# Altium PCB CSP.PcbDoc
Units mm, origin at the board's own origin, x right, y up, seen from the top; angles counter-clockwise.
Board outline 37.21 x 61.85 mm, 2 copper layers (Top Layer, Bottom Layer); 47 components, 23 nets, 91 pads, 56 vias.
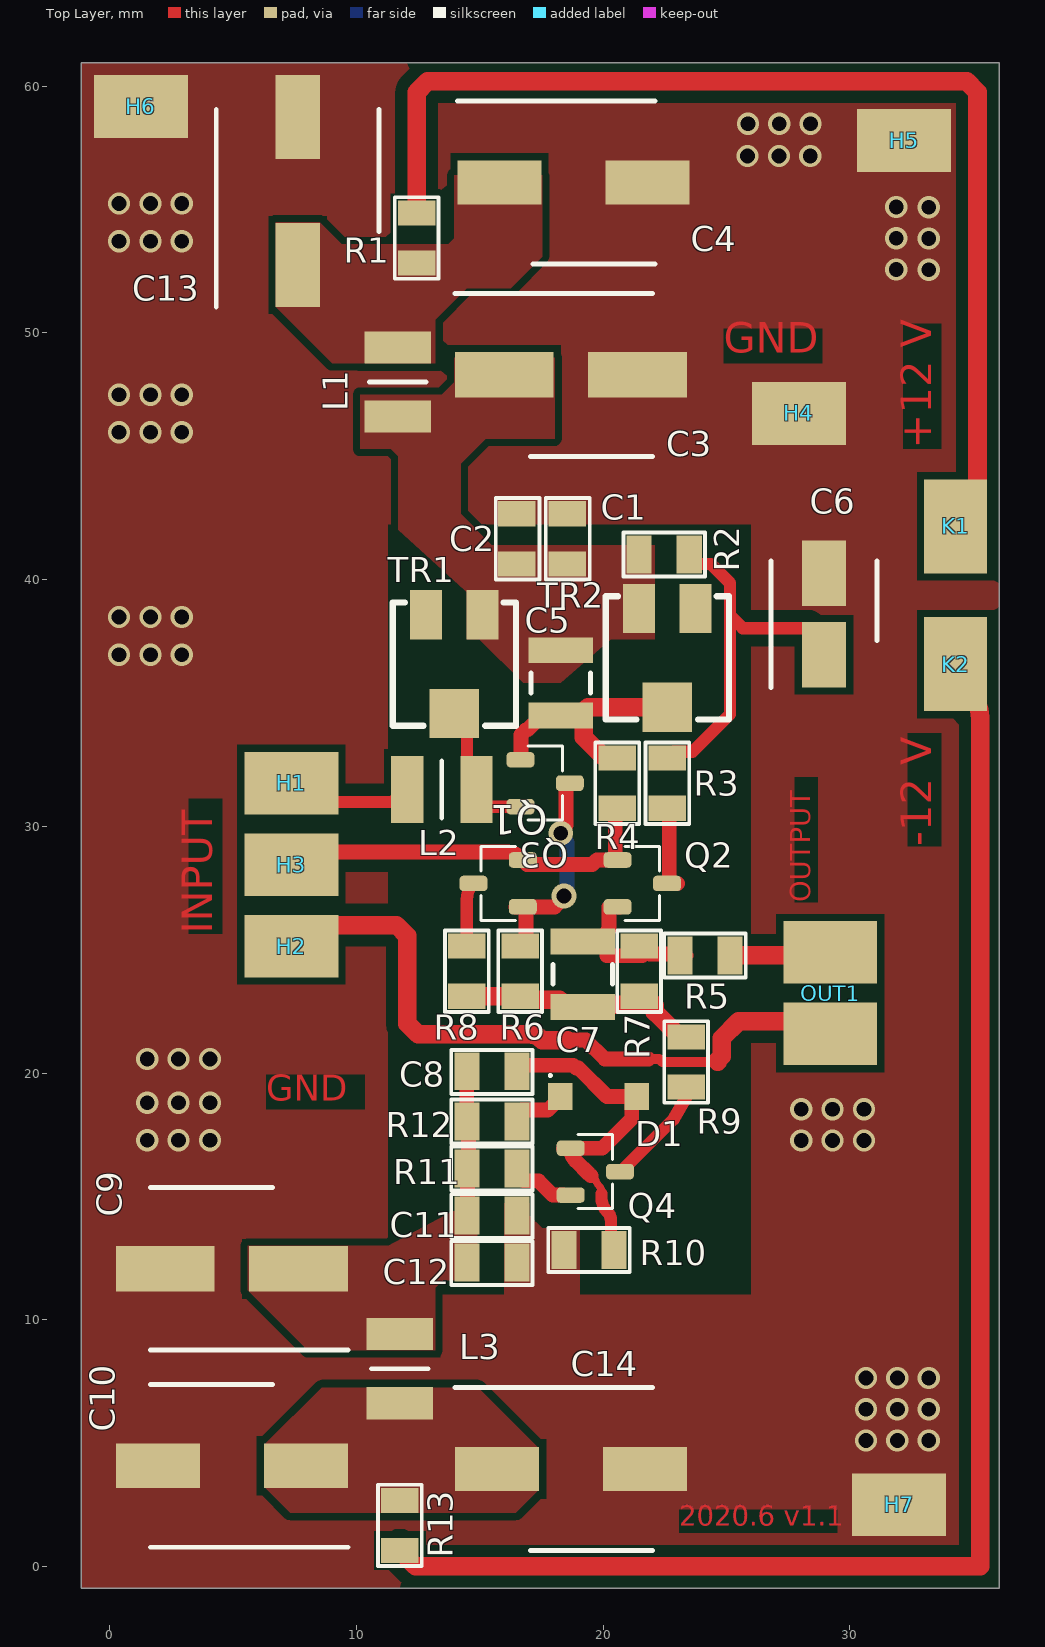
[diagram p0: Top Layer view]
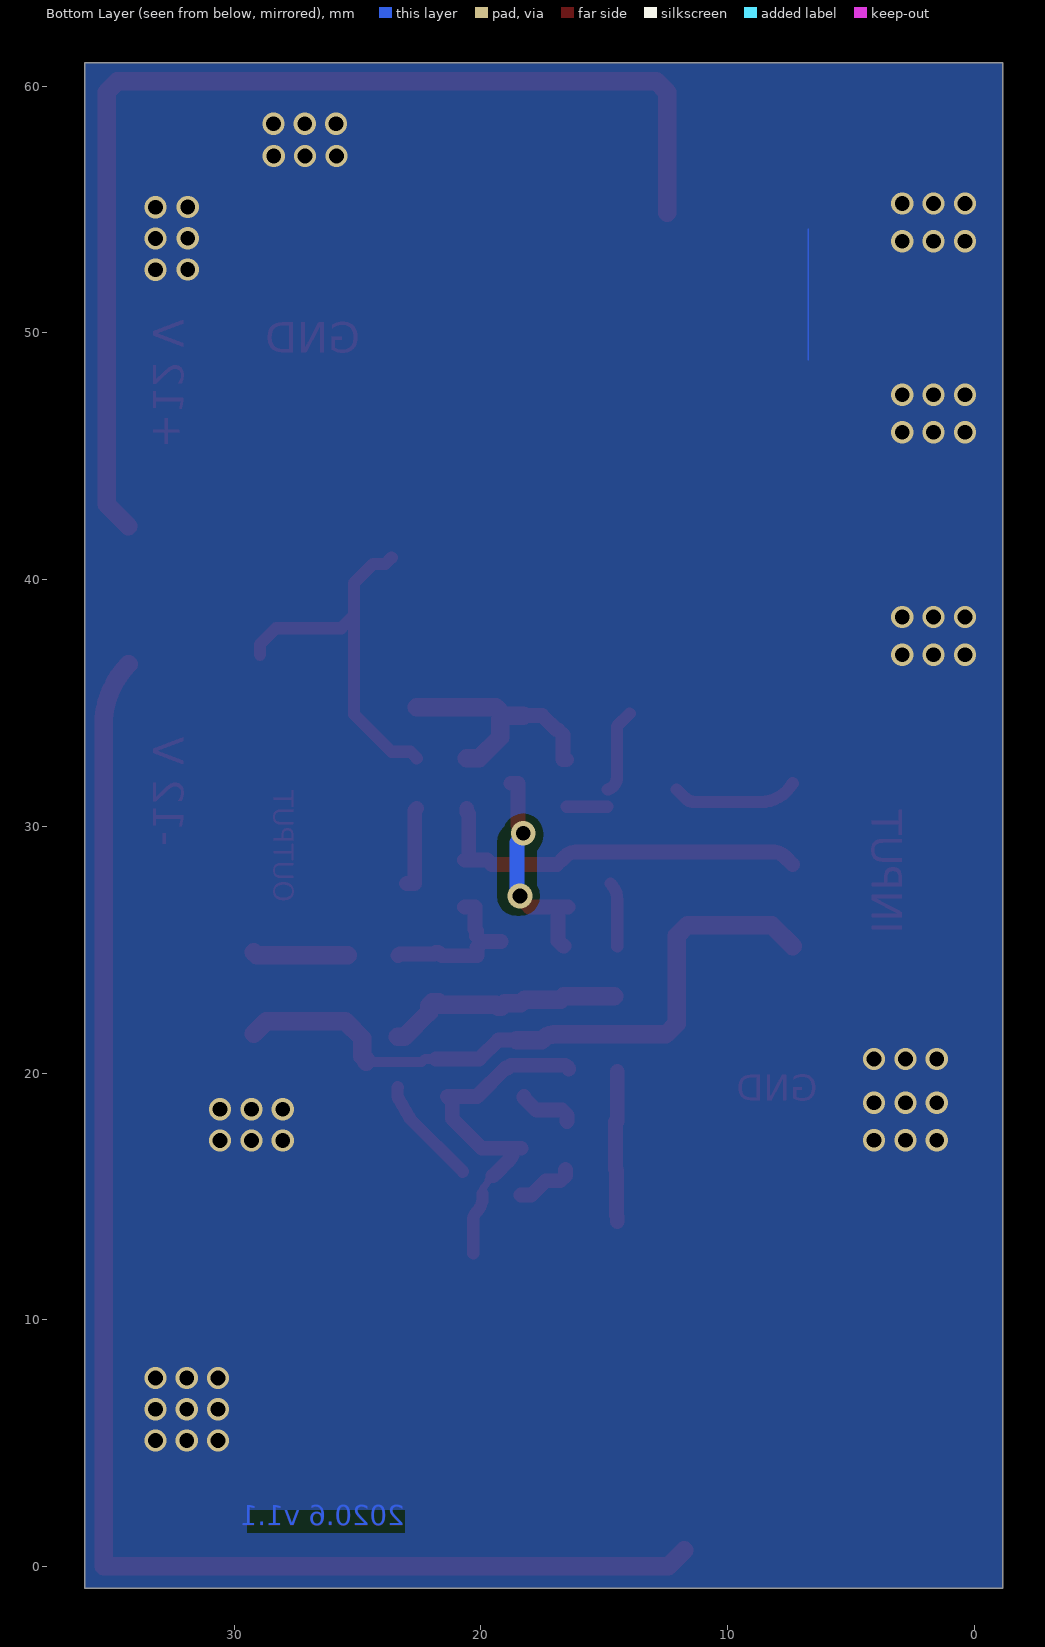
[diagram p1: Bottom Layer view, seen from below]
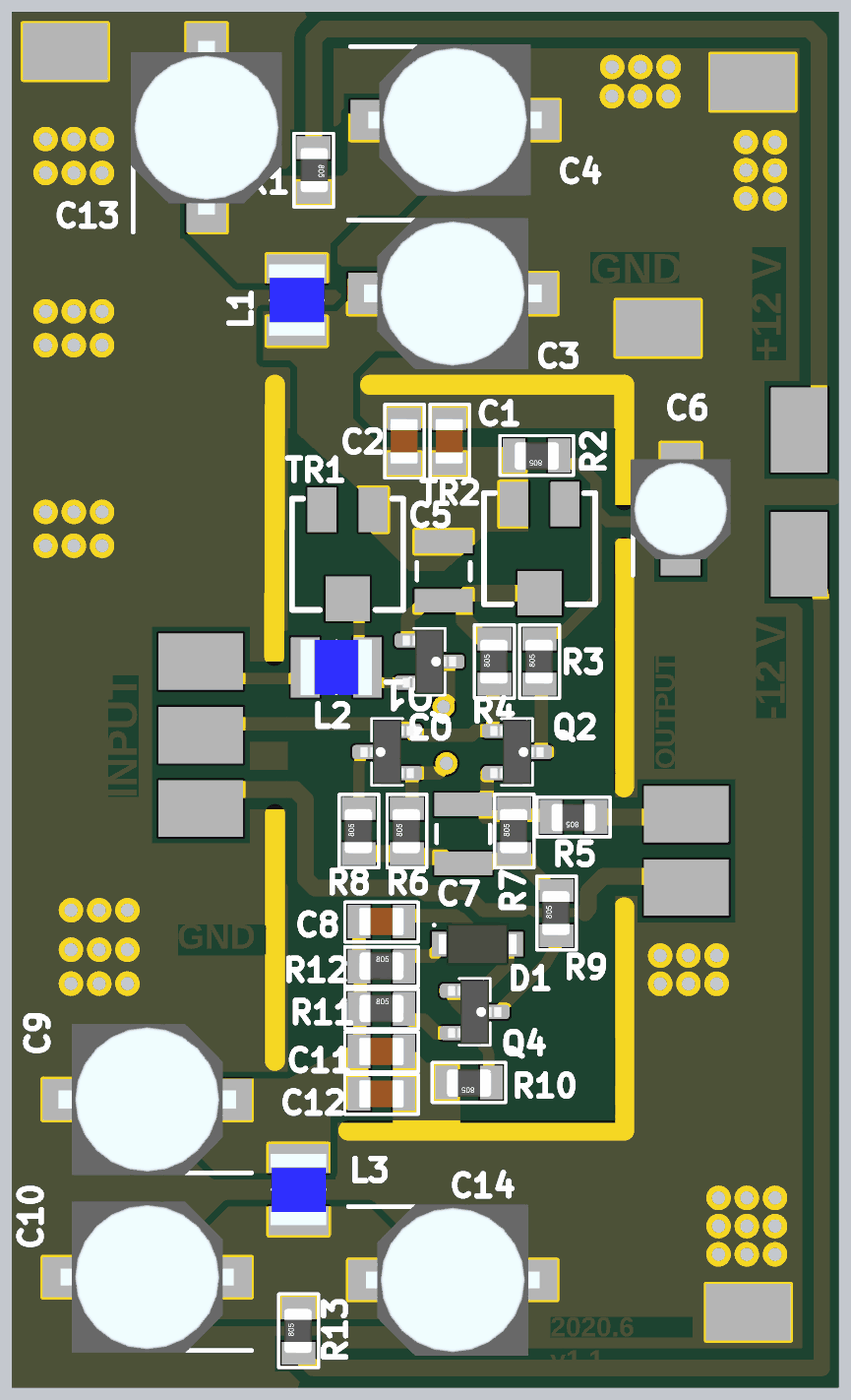
[diagram p2: 3D render of the assembled board from above, using the file's embedded part models]

## Layer stack, top to bottom
Top Solder: solder mask 0.0102, Solder Resist, Dk 3.5
Top Layer: signal copper 0.0356
Dielectric 1: dielectric 0.32, FR-4, Dk 4.8
Bottom Layer: signal copper 0.0356
Bottom Solder: solder mask 0.0102, Solder Resist, Dk 3.5

## Board outline
-1.143,-0.889 36.068,-0.889 36.068,60.96 -1.143,60.96

## Design rules (kind name [scope] priority, off if disabled: settings)
Clearance [All] p1: gap=0.3 ignorepadtopadclearanceinfootprint=FALSE except(0: Arc-Text Arc-Hole Track-Text Track-Hole SMDPad-Text SMDPad-Hole THPad-Text THPad-Hole Via-Text Via-Hole Fill-Text Fill-Hole Poly-Text Poly-Hole Region-Text Region-Hole Text-Text Text-Hole; 0.5: Track-Poly)
HoleSize [All] p1: absolutevalues=TRUE maxlimit=2.54 minlimit=0.406 maxpercent=80.000 minpercent=20.000
MinimumSolderMaskSliver [All] p1: minsoldermaskwidth=0.152
PlaneConnect [All] p1: planeconnectstyle=Direct reliefexpansion=0.508 reliefentries=4 reliefconductorwidth=0.254 reliefairgap=0.254
PolygonConnect [All] p1: connectstyle=Direct reliefconductorwidth=0.254 reliefentries=4 polygonreliefangle="90 Angle" airgapwidth=0.254
RoutingVias [All] p1: holewidth=0.711 width=1.27 viastyle="Through Hole" minholewidth=0.3 minwidth=0.6 maxholewidth=0.711 maxwidth=1.27
ShortCircuit ShortCircuit_1 [All] p1: allowed=FALSE
ShortCircuit TEXT [All] p2 off: allowed=TRUE
SilkToSilkClearance [All] p1 off: silktosilkclearance=0.254
SilkToSolderMaskClearance [IsPad] p1 off: minsilkscreentomaskgap=0.254 clearancetoexposedcopper=TRUE
SolderMaskExpansion [All] p1: expansion=0.102 istentingtop=FALSE
Width [All] p1: maxlimit=5 minlimit=0.254 preferedwidth=0.6 minimp=50.000000 maximp=50.000000 favimp=50.000000
24 further rules are at their usual default settings.

## Components (designator, comment, footprint, x,y, rotation, side; value= is the part's Value field where it differs from the comment)
C1 "0.01uF" SMD-0805-C 18.542,41.656 r270 top
C2 "0.1uF" SMD-0805-C 16.51,41.656 r270 top
C3 "22uF" CAPAE660X550N 18.7,48.3 r0 top
C4 "100uF" CAPAE660X800N 18.8,56.1 r0 top
C5 "1uF" CAPC3225X15L 18.288,35.814 r90 top
C6 "1uF" CAPAE430X550N 28.956,38.608 r90 top
C7 "1uF" CAPC3225X15L 19.177,24.003 r90 top
C8 "0.01uF" SMD-0805-C 15.494,20.066 r180 top
C9 "22uF" CAPAE660X550N 4.953,12.065 r180 top
C10 "100uF" CAPAE660X800N 4.953,4.077 r180 top
C11 "0.01uF" SMD-0805-C 15.494,14.224 r180 top
C12 "0.1uF" SMD-0805-C 15.494,12.319 r180 top
C13 "100uF" CAPAE660X800N 7.62,55.753 r90 top
C14 "100uF" CAPAE660X800N 18.7,3.95 r0 top
D1 "1n4448" SODFL350X110-2N 19.812,19.05 r0 top
H1 "PAD" PAD 7.366,31.75 r0 top
H2 "PAD" PAD 7.366,25.146 r0 top
H3 "PAD" PAD 7.366,28.448 r0 top
H4 "PAD" PAD 27.94,46.736 r0 top
H5 "PAD" PAD 32.2,57.8 r0 top
H6 "PAD" PAD 1.27,59.182 r0 top
H7 "PAD" PAD 32,2.5 r0 top
K1 "+12V" PAD 34.29,42.164 r90 top
K2 "-12V" PAD 34.29,36.576 r90 top
L1 "390uH" INDC3225X270N 11.684,48.006 r90 top
L2 "390uH" INDC3225X270N 13.462,31.496 r0 top
L3 "390uH" INDC3225X270N 11.763,8.014 r90 top
OUT1 "OUTPUT" IN/OUT 29.21,24.892 r0 top
Q1 "MMBTH81" SOT23-3P95_240X110L53X44N 17.653,31.75 r180 top
Q2 "2N3904" SOT23-3P95_240X110L53X44N 21.59,27.686 r180 top
Q3 "2N3906" SOT23-3P95_240X110L53X44N 15.748,27.686 r0 top
Q4 "2N3904" SOT23-3P95_240X110L53X44N 19.685,16.002 r180 top
R1 "100" SMD-0805-RES 12.446,53.848 r270 top
R2 "33" SMD-0805-RES 22.479,41.021 r180 top
R3 "33" SMD-0805-RES 22.606,31.75 r90 top
R4 "3K" SMD-0805-RES 20.574,31.75 r90 top
R5 "51" SMD-0805-RES 24.13,24.765 r180 top
R6 "15k" SMD-0805-RES 16.637,24.13 r90 top
R7 "500" SMD-0805-RES 21.463,24.13 r90 top
R8 "33" SMD-0805-RES 14.478,24.13 r90 top
R9 "33" SMD-0805-RES 23.368,20.447 r90 top
R10 "10K" SMD-0805-RES 19.431,12.827 r180 top
R11 "100" SMD-0805-RES 15.494,16.129 r0 top
R12 "1.4k" SMD-0805-RES 15.494,18.034 r0 top
R13 "100" SMD-0805-RES 11.763,1.664 r90 top
TR1 "20k" POT4MM-2 13.97,36.576 r270 top
TR2 "20k" POT4MM-2 22.606,36.83 r270 top

## Footprints (in the part's own frame and the unit in brackets; to place one, negate y for a bottom-side part, rotate by r counter-clockwise, add the part's x,y. Pads: shape width x height; smd on the part's side, far side on the other; paste and mask are expansions set on the pad)
CAPAE430X550N [mm]
  rect 2.65x1.8 smd: 1(-1.65,0) 2(1.65,0)
  silkscreen extent -2.98,-2.15 2.15,2.15, body extent -2.25,-2.25 2.25,2.25, height 5.5
CAPAE660X550N [mm]
  rect 4x1.85 smd: 1(-2.7,0) 2(2.7,0)
  silkscreen extent -4.7,-3.3 3.3,3.3, body extent -4,-3.4 4,3.4, height 5.5
CAPAE660X800N [mm]
  rect 3.4x1.8 smd: 1(-3,0) 2(3,0)
  silkscreen extent -4.7,-3.3 3.3,3.3, body extent -3.9,-3.4 3.9,3.4, height 8
CAPC3225X15L [mm] "Chip Capacitor, 1210, 2-Leads, Body 3,20x2,50mm, IPC High Density"
  rect 1.05x2.6 smd: 1(-1.325,0) 2(1.325,0)
  silkscreen extent -0.4,-1.2 0.4,1.2, body extent -1.7,-1.35 1.7,1.35, height 1.5
IN/OUT [mil]
  rect 150x100 smd: 1(0,0) 2(0,-130)
INDC3225X270N [mm]
  rect 1.3x2.7 smd: 1(-1.4,0) 2(1.4,0)
  silkscreen extent 0,-1.15 0,1.15, body extent -1.6,-1.25 1.6,1.25, height 2.7
PAD [mm]
  rect 3.81x2.54 smd: 1(0,0)
POT4MM-2 [mm] "Square Trimming Potentiometer"
  rect 2x1.3 smd: CCW(-2,-1.15) CW(-2,1.15)
  rect 2x2 smd: W(2,0)
  silkscreen extent -2.5,-2.5 2.5,2.5
SMD-0805-C [mil]
  rect 40x60 smd: 1(-40,0) 2(40,0)
  silkscreen extent -65,-34 65,36, body extent -40,-25 40,25, height 37
SMD-0805-RES [mil]
  rect 40x60 smd: 1(-40,0) 2(40,0)
  silkscreen extent -65,-35 65,35, body extent -39,-24 39,26, height 31
SODFL350X110-2N [mm] "SODFL, 2-Leads, Body 1.70x3.50mm, IPC Medium Density"
  rect 1x1.1 smd: A(1.55,0) C(-1.55,0)
  silkscreen extent -2,0.8 -1.9,0.9, body extent -1.75,-0.95 1.75,0.95, height 1.1
SOT23-3P95_240X110L53X44N [mm] "Small Outline Transistor (SOT23), 0.95 mm pitch; 3 pin, 2.90 mm L X 1.30 mm W X 1.10 mm H body"
  rrect51% 1.13x0.63 smd: 1(-1,0) 2(1,0.95) 3(1,-0.95)
  silkscreen extent -0.7,-1.5 0.7,1.5, body extent -1.2,-1.45 1.2,1.45, height 1.1

## Part data
C1 C8 C11: library part Cap, "Capacitor", LCSC Part #=C1710, LatestRevisionDate=17-Jul-2002, LatestRevisionNote="Re-released for DXP Platform.", PackageDescription="Radial Cap, Thru-Hole; 2 Leads; 0.3 in Pin Spacing", PackageReference=RAD-0.3, Published=8-Jun-2000, Publisher="Altium Limited"
C2 C12: library part Cap, "Capacitor", LCSC Part #=C49678, LatestRevisionDate=17-Jul-2002, LatestRevisionNote="Re-released for DXP Platform.", PackageDescription="Radial Cap, Thru-Hole; 2 Leads; 0.3 in Pin Spacing", PackageReference=RAD-0.3, Published=8-Jun-2000, Publisher="Altium Limited"
C3 C9: library part TYEH1V226F55MTR, "22uF 35V, Capacitor Polarised", LCSC Part #=C249771, Voltage=35V, Dimension=6.3x5.3mm, Part number=TYEH1V226F55MTR
C4 C10 C13 C14: library part EEEFK1E101P, "100uF 25V, cap polarised", LCSC Part #=C249983, Voltage=25V, Dimensions=8x6.2mm, Part number=EEEFK1E101P
C5 C7: library part capacitor, LCSC Part #=C117027
C6: library part UWT1H010MCL1GB, "1uF 50V, Capacitor Polarised", Manufacturer_Name=Nichicon, Voltage=50V, Dimensions=4x5.4mm, Part number=UWT1H010MCL1GB
D1: library part Diode, "SOD123, 1n4446 orginally", LCSC Part #=C108428
L1 L2 L3: library part NLV10JT391, "390uH, Inductor, LCSC part is 330uH1!!!", LCSC Part #=C87557, Package=1210, Resistance=36
Q1: library part PNP, "PNP Bipolar Transistor, Aternatives: NTE2403", LCSC Part #=C190349, LatestRevisionDate=29-May-2009, LatestRevisionNote="IPC-7351 Footprint Added.", PackageDescription="3-Pin SOT-23 Package 0.95 mm Pitch, 2.4 mm Lead Span", PackageReference=SOT-23B, PackageVersion=Aug-1999, Published=8-Jun-2000, Publisher="Altium Limited", Supplier 1=Arrow, Supplier 2=Digi-Key, Supplier Part Number 1=MMBTH81, Supplier Part Number 2=KST10MTFCT-ND
Q2 Q4: library part NPN, "NPN Bipolar Transistor", LCSC Part #=C18536, Code_JEDEC=TO-226-AA, LatestRevisionDate=17-Jul-2002, LatestRevisionNote="Re-released for DXP Platform.", PackageDescription="TO, Flat Index; 3 In-Line, Axial Leads; Body Dia. 4.8mm; Leads 0.55 x 0.51 mm (max)", PackageReference=TO-226-AA, Published=8-Jun-2000, Publisher="Altium Limited"
Q3: library part PNP, "PNP Bipolar Transistor", LCSC Part #=C14488, LatestRevisionDate=29-May-2009, LatestRevisionNote="IPC-7351 Footprint Added.", PackageDescription="3-Pin SOT-23 Package 0.95 mm Pitch, 2.4 mm Lead Span", PackageReference=SOT-23B, PackageVersion=Aug-1999, Published=8-Jun-2000, Publisher="Altium Limited"
R1 R11 R13: library part Res1, "Resistor", LCSC Part #=C17408, LatestRevisionDate=17-Jul-2002, LatestRevisionNote="Re-released for DXP Platform.", PackageDescription="Axial Device, Thru-Hole; 2 Leads; 0.3 in Pin Spacing", PackageReference=AXIAL-0.3, Published=8-Jun-2000, Publisher="Altium Limited"
R2 R3 R8 R9: library part Res1, "Resistor", LCSC Part #=C17634, LatestRevisionDate=17-Jul-2002, LatestRevisionNote="Re-released for DXP Platform.", PackageDescription="Axial Device, Thru-Hole; 2 Leads; 0.3 in Pin Spacing", PackageReference=AXIAL-0.3, Published=8-Jun-2000, Publisher="Altium Limited"
R4: library part Res1, "Resistor", LCSC Part #=C17661, LatestRevisionDate=17-Jul-2002, LatestRevisionNote="Re-released for DXP Platform.", PackageDescription="Axial Device, Thru-Hole; 2 Leads; 0.3 in Pin Spacing", PackageReference=AXIAL-0.3, Published=8-Jun-2000, Publisher="Altium Limited"
R5: library part Res1, "Resistor", LCSC Part #=C17738, LatestRevisionDate=17-Jul-2002, LatestRevisionNote="Re-released for DXP Platform.", PackageDescription="Axial Device, Thru-Hole; 2 Leads; 0.3 in Pin Spacing", PackageReference=AXIAL-0.3, Published=8-Jun-2000, Publisher="Altium Limited"
R6: library part Res1, "Resistor", LCSC Part #=C17475, LatestRevisionDate=17-Jul-2002, LatestRevisionNote="Re-released for DXP Platform.", PackageDescription="Axial Device, Thru-Hole; 2 Leads; 0.3 in Pin Spacing", PackageReference=AXIAL-0.3, Published=8-Jun-2000, Publisher="Altium Limited"
R7: library part Res1, "Resistor", LCSC Part #=C17734, LatestRevisionDate=17-Jul-2002, LatestRevisionNote="Re-released for DXP Platform.", PackageDescription="Axial Device, Thru-Hole; 2 Leads; 0.3 in Pin Spacing", PackageReference=AXIAL-0.3, Published=8-Jun-2000, Publisher="Altium Limited"
R10: library part Res1, "Resistor", LCSC Part #=C17414, LatestRevisionDate=17-Jul-2002, LatestRevisionNote="Re-released for DXP Platform.", PackageDescription="Axial Device, Thru-Hole; 2 Leads; 0.3 in Pin Spacing", PackageReference=AXIAL-0.3, Published=8-Jun-2000, Publisher="Altium Limited"
R12: library part Res1, "Resistor", LCSC Part #=C17388, LatestRevisionDate=17-Jul-2002, LatestRevisionNote="Re-released for DXP Platform.", PackageDescription="Axial Device, Thru-Hole; 2 Leads; 0.3 in Pin Spacing", PackageReference=AXIAL-0.3, Published=8-Jun-2000, Publisher="Altium Limited"
TR1 TR2: library part "RPot SM", "Square Trimming Potentiometer", ComponentLink1Description="Manufacturer Link", ComponentLink1URL=http://bourns.com/2/search.html, DatasheetVersion=Oct-2003, PackageDescription="Square Trimming Potentiometer", PackageReference=POT4MM-2, Published=17-Dec-2003, Publisher="Altium Limited"

## Via types
v1: diameter 0.9, hole 0.6, Top Layer to Bottom Layer, 54 vias
v2: diameter 1, hole 0.6, Top Layer to Bottom Layer, 2 vias

## Nets (pads, with @x,y where several pads share a name; then routed paths per layer and width w, separated by ;. In a path a pad name is that pad's centre, name@x,y a point inside that pad or via, vN(x,y) a via of type N, cw(c..) or ccw(c..) an arc to the next point about the centre after c; other vN are vias at no path point)
GND: C1.1 C2.1 C3.2 C4.2 C6.2 C9.2 C10.2 C11.1 C12.1 C13.2 C14.2 H4.1 H5.1 H6.1 H7.1 R10.2
  other v1: 30.66,5.1 31.93,5.1 33.2,5.1 30.66,6.37 31.93,6.37 33.2,6.37 30.66,7.64 31.93,7.64 33.2,7.64 1.524,17.272 2.794,17.272 4.064,17.272 28.034,17.264 29.304,17.264 30.574,17.264 28.034,18.534 29.304,18.534 30.574,18.534 1.524,18.796 2.794,18.796 4.064,18.796 1.524,20.574 2.794,20.574 4.064,20.574 0.381,36.957 1.651,36.957 2.921,36.957 0.381,38.481 1.651,38.481 2.921,38.481 0.381,45.974 1.651,45.974 2.921,45.974 0.381,47.498 1.651,47.498 2.921,47.498 33.2,52.56 31.886,52.572 0.381,53.721 1.651,53.721 2.921,53.721 33.2,53.83 31.886,53.842 33.2,55.1 31.886,55.112 0.381,55.245 1.651,55.245 2.921,55.245 25.86,57.17 27.13,57.17 28.4,57.17 25.872,58.484 27.142,58.484 28.412,58.484
GND_HF: H2.1 OUT1.2 | length 27.9
  Top Layer w0.4: 21.844,20.574 22.28,20.574 22.399,20.455 24.655,20.455
  Top Layer w0.6: 18.541,21.337 19.303,21.337 20.066,20.574 21.844,20.574
  Top Layer w0.75: H2.1 8.22,26 11.626,26 12.065,25.561 12.065,22.007 12.504,21.568 17.02,21.568 cw(c17.02,20.893) 17.499,21.369 17.519,21.348 17.531,21.337 18.541,21.337 ; 24.655,20.455 24.655,20.525 24.805,20.675 24.805,21.405 25.5,22.1 28.7,22.1 OUT1.2
NetC1_2: C1.2 C2.2 C3.1 C5.2 L1.1 R2.2 TR1.CW TR2.CCW
NetC4_1: C4.1 C13.1 L1.2 R1.2
NetC5_1: C5.1 Q1.3 R4.2 TR2.W | length 10.2
  Top Layer w0.6: Q1.3@16.528,32.7 16.676,32.7 16.676,33.71 16.881,33.915 16.939,33.915 17.513,34.489 C5.1
  Top Layer w0.75: C5.1 C5.1@19.063,34.489 ; R4.2 20.066,32.766 19.213,33.619 19.213,34.339 C5.1@19.063,34.489 ; TR2.W 19.404,34.83 C5.1@19.063,34.489
NetC6_1: C6.1 R2.1 R3.2 | length 15.3
  Top Layer w0.5: R3.2 22.864,33.024 23.626,33.024 25.146,34.544 25.146,38.554 ; R2.1@23.622,40.894 23.88,40.636 24.378,40.636 25.146,39.868 25.146,38.554 ; C6.1 28.956,37.383 28.306,38.033 25.667,38.033 25.146,38.554
NetC7_1: C7.1 R6.1 R7.1 R8.1 R9.2 | length 9.6
  Top Layer w0.75: R8.1@14.605,23.114 R6.1 16.77,22.981 18.226,22.981 18.379,22.828 19.027,22.828 C7.1 ; C7.1@19.304,22.678 19.395,22.769 21.463,22.769 21.626,22.769 21.717,22.86 21.971,22.86 22.104,22.727 22.104,22.473 23.114,21.463 R9.2
NetC7_2: C7.2 Q2.2 R5.2 R7.2 | length 6.6
  Top Layer w0.6: C7.2 19.938,25.328 20.163,25.103 20.163,24.756 21.581,24.756 R7.2@21.717,24.892 ; C7.2@19.952,25.328 20.177,25.553 20.177,25.753 20.244,25.82 20.244,26.736 Q2.2@20.669,26.736 ; R7.2@21.844,24.892 21.907,24.828 23.304,24.828 R5.2@23.368,24.765
NetC8_1: C8.1 D1.A Q4.3 R10.1 | length 14.6
  Top Layer w0.3: 19.52,15.833 cw(c19.42,15.551) 19.703,15.648 ccw(c20.281,15.848) 19.85,15.414 cw(c19.639,15.201) 19.939,15.2 19.939,15.113
  Top Layer w0.5: 19.939,15.113 19.939,14.935 ccw(c20.737,14.935) 20.173,14.371 cw(c19.82,14.017) 20.32,14.017 R10.1@20.32,12.7
  Top Layer w0.6: C8.1@16.44,20.158 cw(c16.662,20.086) 16.663,20.32 18.793,20.32 18.913,20.2 19.011,20.2 20.161,19.05 D1.A 21.162,18.85 21.162,18.145 19.969,16.952 Q4.3 ; Q4.3@18.383,16.952 Q4.3 ; 19.52,15.833 ccw(c19.089,15.206) 19.516,15.836 cw(c19.853,16.332) 19.429,15.908 18.897,16.44 cw(c19.409,16.952) Q4.3
NetC8_2: C8.2 C9.1 C11.2 C12.2 L3.2 R11.1 R12.1 | length 6.1
  Top Layer w0.6: C11.2@14.478,13.97 14.478,14.19 14.511,14.223 14.511,16.061 14.544,16.094 R12.1@14.544,18.034 ; R12.1 C8.2
NetC10_1: C10.1 C14.1 L3.1 R13.2
NetD1_C: D1.C R12.2 | length 2.4
  Top Layer w0.6: R12.2 16.51,18.288 16.718,18.496 17.758,18.496 18.262,19 D1.C
NetH1_1: H1.1 L2.1 | length 5.2
  Top Layer w0.5: H1.1 ccw(c8.672,32.488) 8.672,30.988 11.347,30.988 ccw(c11.347,31.488) 11.7,31.134 L2.1
NetH3_1: H3.1 Q2.3 Q3.2 R4.1 | length 15.8
  Top Layer w0.6: H3.1 7.698,28.78 cw(c8.123,28.356) 8.123,28.956 16.159,28.956 cw(c16.159,28.356) 16.584,28.78 Q3.2@16.728,28.636 ; Q3.2@16.916,28.448 19.561,28.448 19.749,28.636 20.669,28.636 20.495,28.636 20.495,30.5 20.574,30.579 R4.1
NetK1_1: K1.1 R1.1 | length 46
  Top Layer w0.75: R1.1 12.446,59.761 12.885,60.2 34.74,60.2 35.179,59.761 35.179,43.053 K1.1
NetK2_1: K2.1 R13.1 | length 60.7
  Top Layer w0.75: R13.1 12.411,0 35.3,0 35.3,34.117 ccw(c31.837,34.117) 34.286,36.565 K2.1
NetL2_2: L2.2 Q1.2 TR1.W | length 5.1
  Top Layer w0.5: TR1.W 14.484,34.062 14.484,31.981 ccw(c14.984,31.981) L2.2 ; L2.2@14.884,30.8 Q1.2@16.528,30.8
NetOUT1_1: OUT1.1 R5.1 | length 3.9
  Top Layer w0.75: R5.1@25.4,24.765 29.083,24.765 OUT1.1
NetQ1_1: Q1.1 Q3.3 R6.2 | length 8.8
  Top Layer w0.6: Q3.3@16.474,26.736 16.873,26.736 16.873,25.354 16.665,25.146 R6.2 ; Q3.3@16.601,26.736 Q3.3@16.746,26.736 ; Q3.3@17,26.736 18.046,26.736 18.415,27.105 v2(18.415,27.178) ; v2@18.397,29.863 18.365,29.895 18.365,29.903 18.503,30.041 18.503,31.75 Q1.1@18.778,31.75
  Bottom Layer w0.6: v2(18.288,29.718) 18.288,29.61 18.542,29.356 v2@18.542,27.178
NetQ2_1: Q2.1 R3.1 | length 3.4
  Top Layer w0.6: R3.1 22.685,30.655 22.685,27.686 Q2.1@23.019,27.686
NetQ3_1: Q3.1 R8.2 | length 2.6
  Top Layer w0.5: R8.2 14.478,27.034 cw(c15.4,27.034) Q3.1
NetQ4_1: Q4.1 R9.1 | length 4.5
  Top Layer w0.5: Q4.1@20.733,16.002 22.86,18.129 23.383,19.032 23.383,19.416 R9.1
NetQ4_2: Q4.2 R11.2 | length 2.4
  Top Layer w0.6: R11.2@16.576,16.094 16.576,15.84 16.784,15.632 17.378,15.632 17.958,15.052 Q4.2@18.383,15.052
pads on no net: TR1.CCW TR2.CW

## Polygon pours and split planes (outlines as drawn)
GND on Top Layer "GND_plane" (solid, pour order 50): -1.143,60.953 -1.143,42.251 26.008,42.251 26.008,11.009 11.276,11.009 11.276,42.251 -1.143,42.251 -1.143,-0.896 36.068,-0.896 36.068,60.953
NetC8_2 on Top Layer "NONET_L-01_P-001" (solid, pour order 49): 13.2,8.763 13.2,11.3 13.5,11.6 14.9,11.6 14.9,13 14.9,14.4 13.9,14.4 11.3,13 5.6,13 5.6,11.2 8.037,8.763
no net on Top Layer "NONET_L-01_P-001" (solid, pour order 48): 13.589,8.763
NetC10_1 on Top Layer "NONET_L-01_P-001" (solid, pour order 47): 7.318,2.172 6.302,3.188 6.302,4.966 8.588,7.252 14.938,7.252 17.351,4.839 17.351,3.061 16.462,2.172
NetC4_1 on Top Layer "NONET_L-01_P-001" (solid, pour order 41): 9.398,53.594 8.509,54.483 6.731,54.483 6.731,51.054 9.017,48.768 13.208,48.768 13.208,53.594
NetC1_2 on Top Layer "NETC1_2_L01_P013" (solid, pour order 13): 14.986,39.116 14.986,37.592 16.764,35.814 18.288,35.814 20.32,37.592 20.32,39.116
GND on Top Layer "GND_L01_P040" (solid, pour order 40): 16.002,14.732 16.002,11.176 16.002,10.414 19.05,10.414 19.05,13.716 17.526,13.716 17.018,14.224 17.018,14.732
NetC4_1 on Top Layer "NETC4_1_L01_P039" (solid, pour order 39): 10.16,48.768 10.16,51.054 11.176,52.07 11.43,52.07 11.43,53.594 13.716,53.594 13.97,53.848 13.97,56.388 17.526,56.388 17.526,53.086 16.256,51.816 14.478,51.816 13.208,50.546 13.208,48.768
NetC1_2 on Top Layer "NETC1_2_L01_P023" (solid, pour order 23): 14.478,37.592 14.478,41.402 22.098,41.402 22.098,37.592
NetC1_2 on Top Layer "NETC1_2_L01_P038" (solid, pour order 38): 18.034,49 13.97,49 13.97,48.006 13.462,47.498 10.16,47.498 10.16,45.3 11.4,45.3 11.7,45 11.7,42.017 14.615,39.37 16.256,39.37 16.256,41.402 15.494,41.402 14.224,42.672 14.224,44.704 15.24,45.72 18.034,45.72
no net on Top Layer "NONET_L01_P018" (solid, pour order 18): -0.254,27.178
no net on Top Layer "NONET_L01_P017" (solid, pour order 17): -0.254,27.559
no net on Top Layer "NONET_L01_P008" (solid, pour order 8): 7.366,93.726
no net on Top Layer "NONET_L01_P003" (solid, pour order 3): 37.338,78.232
no net on Top Layer "NONET_L01_P000" (solid, pour order 0): 28.702,86.36
no net on Bottom Layer "NONET_L-01_P-001" (solid, pour order 46): 11.43,53.594
no net on Bottom Layer "NONET_L-01_P-001" (solid, pour order 44): 6.731,54.229
no net on Bottom Layer "NONET_L-01_P-001" (solid, pour order 43): 6.731,54.229 6.731,48.895
GND on Bottom Layer "NONET_L-01_P-001" (solid, pour order 42): -1.143,60.953 36.068,60.953 36.068,-0.896 -1.143,-0.896

## Other copper
Top Layer:
  text "GND" at 24.892,48.793 h2.1
  text "+12 V" at 33.7,45.3 h2.1 r90
  text "-12 V" at 33.7,29.2 h2.1 r90
  text "OUTPUT" at 28.685,26.924 h1.4 r90
  text "INPUT" at 4.572,25.654 h2.1 r90
  text "GND" at 6.35,18.542 h1.8
  text "2020.6 v1.1" at 23.095,1.366 h1.4
Bottom Layer:
  text "2020.6 v1.1" at 23.095,1.383 h1.4

## Silkscreen, mask and mechanical layers (free items; w line width, h text height)
Top Solder:
  lines w0.9: 10.668,32.004 10.7,44.2 ; 10.7,13.8 10.7,24.9 ; 14,10.668 26.416,10.668 26.416,20.7 ; 14.986,44.196 26.416,44.196 26.416,39 ; 26.4,26.1 26.4,36.9
Mechanical 1:
  the board outline again, w0.3
Mechanical 4:
  lines w0.7: 26.162,43.688 26.416,43.688